# Altium PCB Glucometer-E.C.- Full V1.2.PcbDoc
Units mm, origin at the board's own origin, x right, y up, seen from the top; angles counter-clockwise.
Board outline 54 x 65 mm, 2 copper layers (Top Layer, Bottom Layer); 47 components, 56 nets, 206 pads, 28 vias.
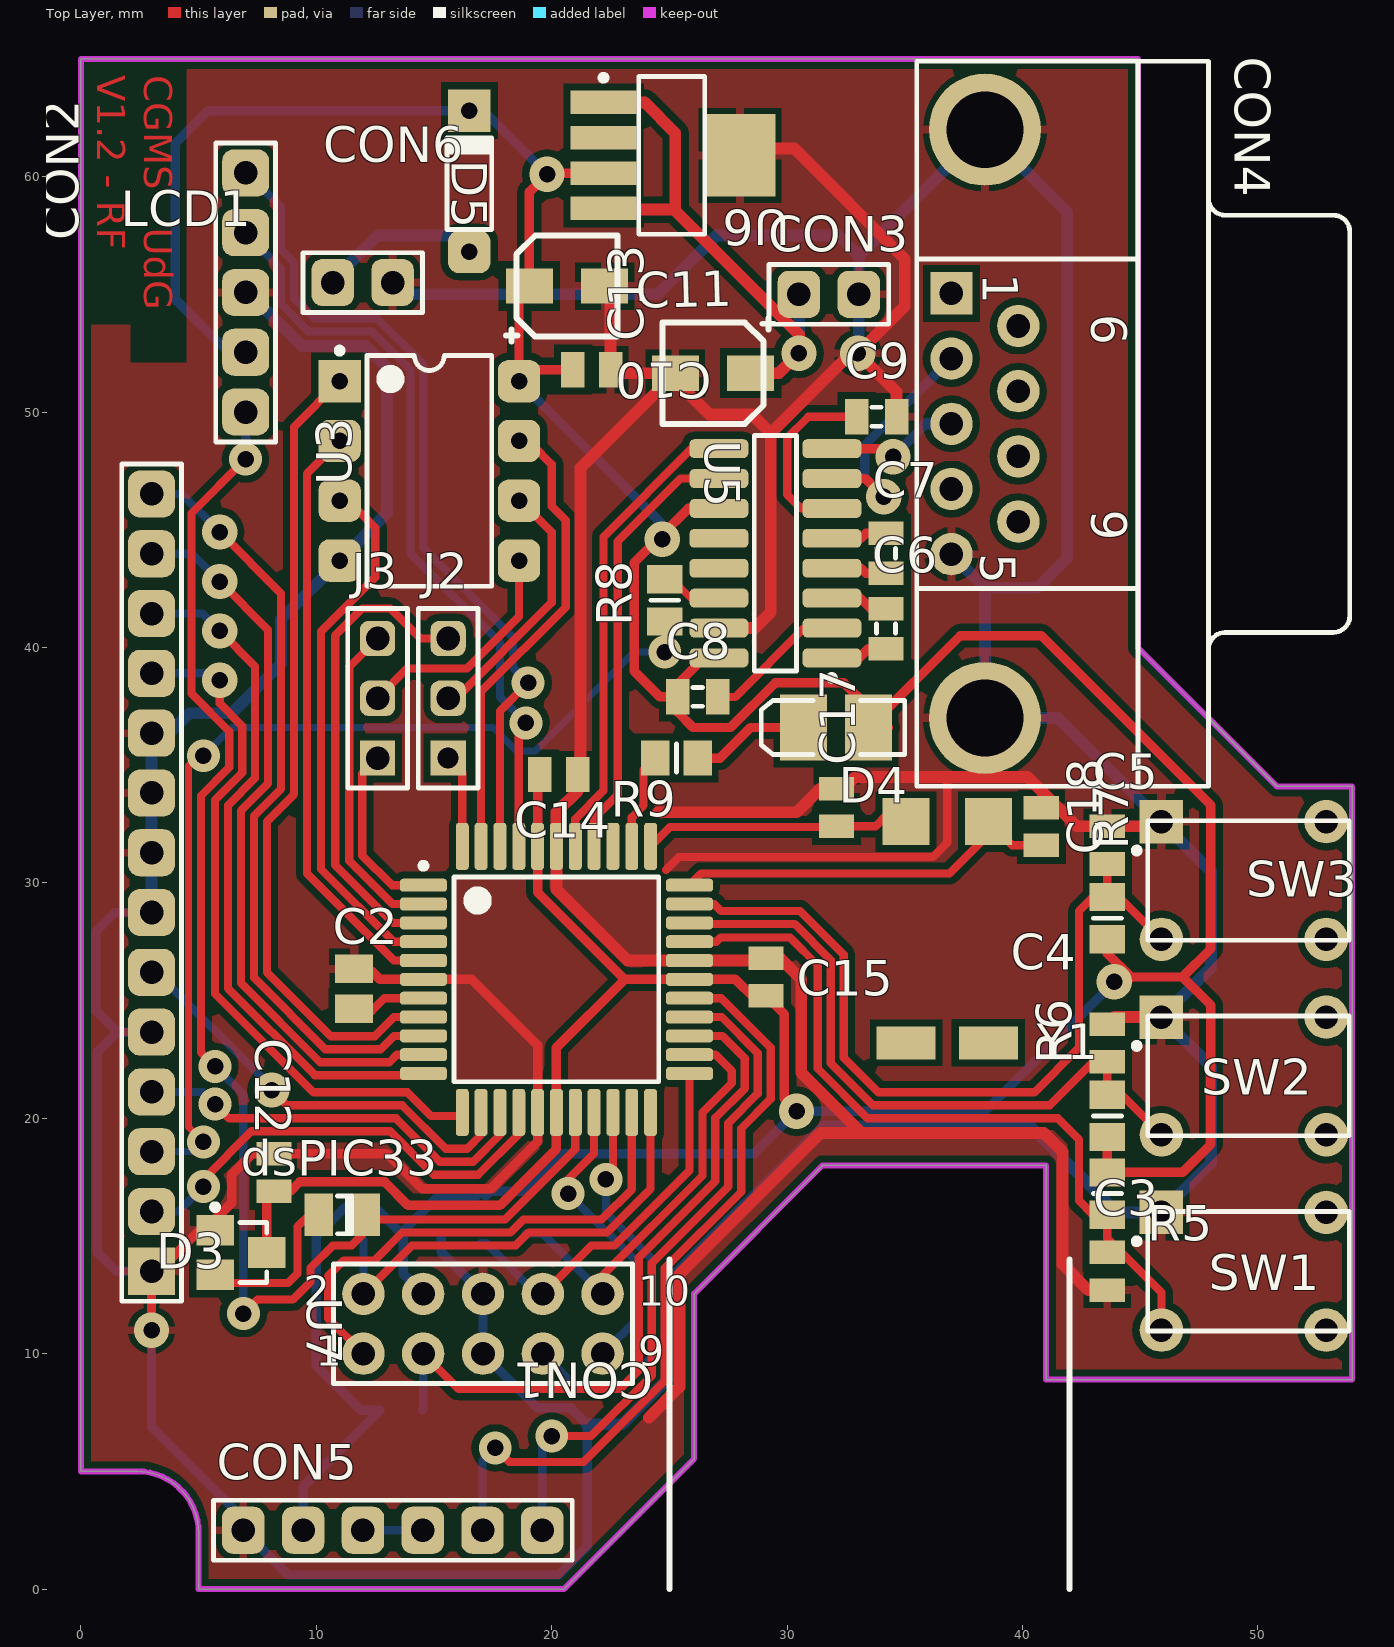
[diagram p0: Top Layer view]
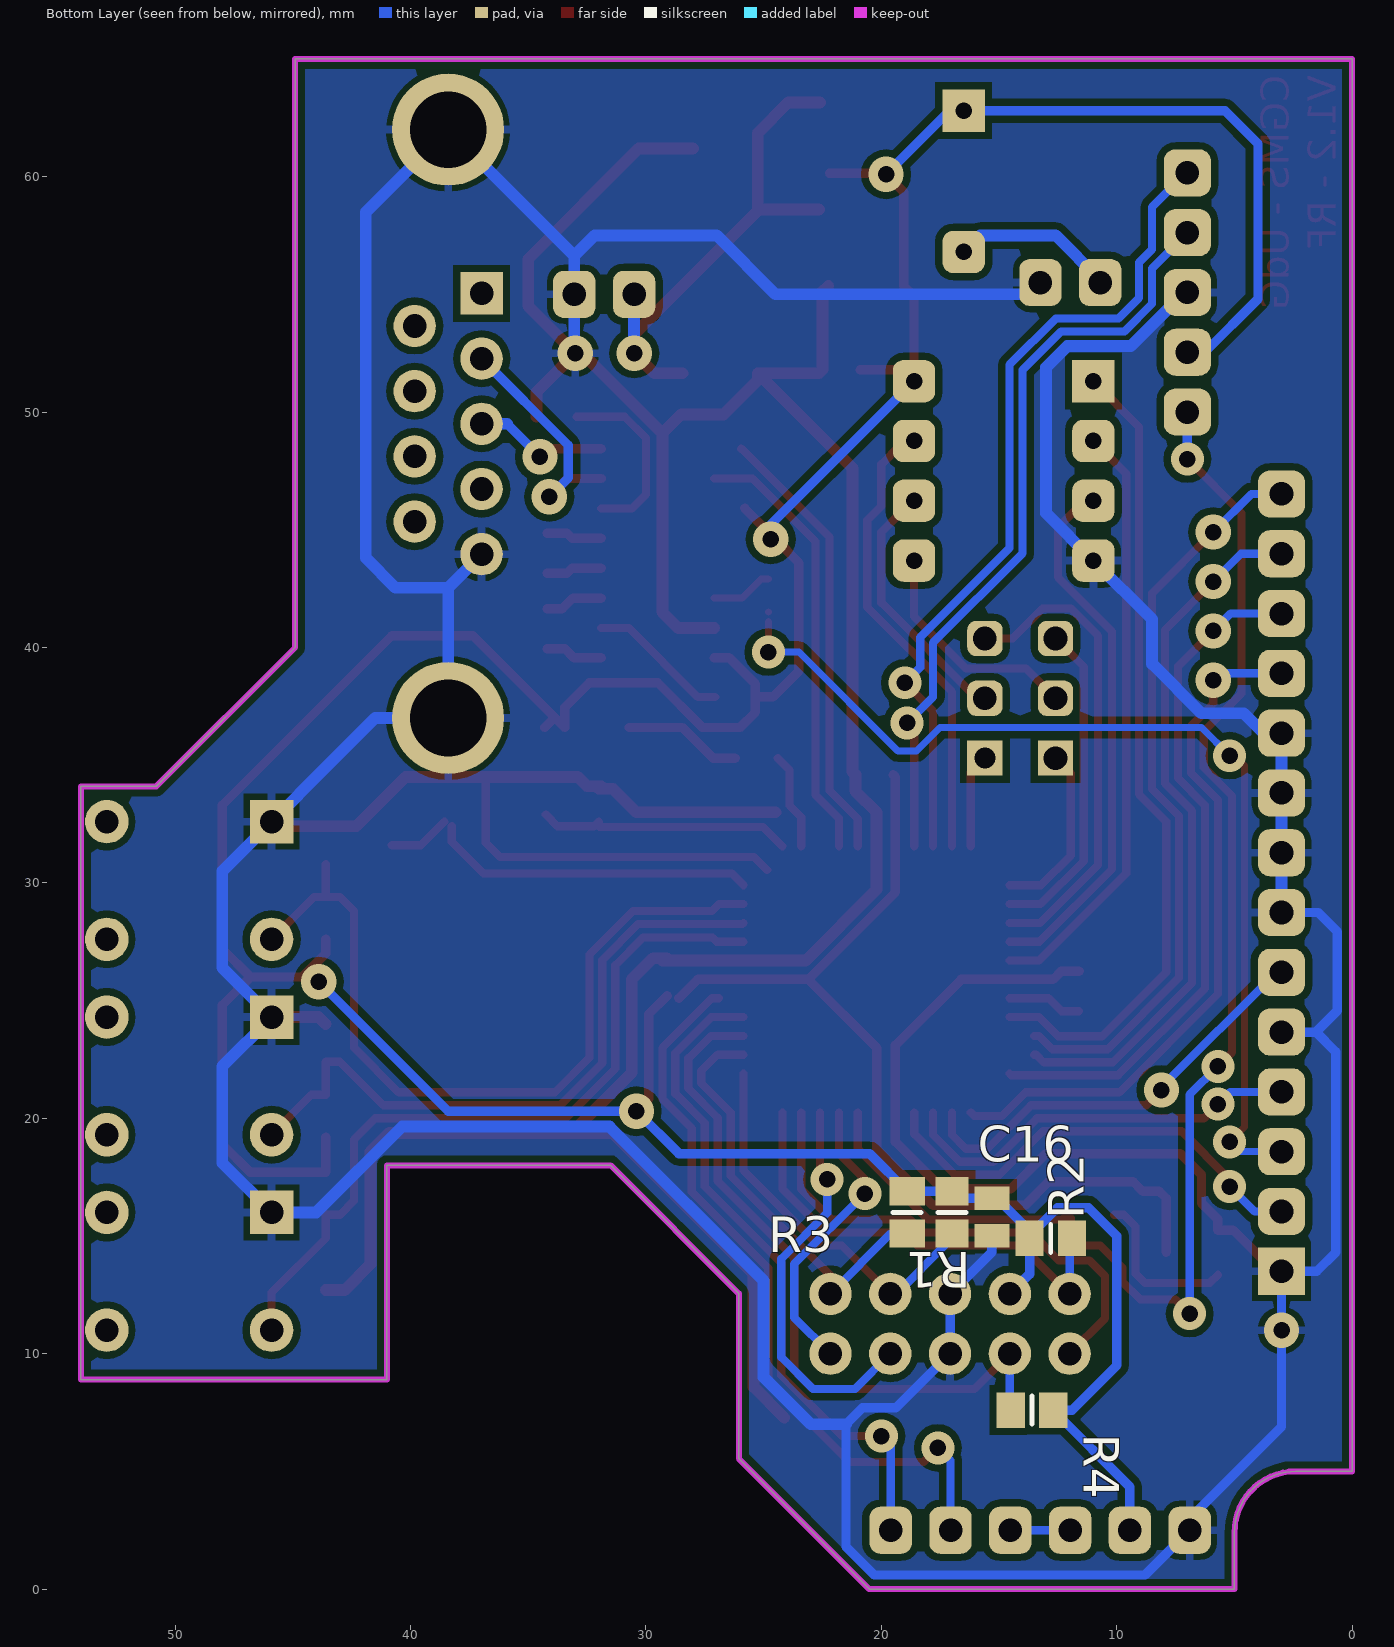
[diagram p1: Bottom Layer view, seen from below]

## Layer stack, top to bottom
Top Layer: signal copper 0.0356
Dielectric: dielectric 0.32, FR-4, Dk 4.8
Bottom Layer: signal copper 0.0356

## Board outline
0,5 2.4,5 cw(c2.4,2.4) 5,2.4 5,0 20.513,0 26.05,5.537 26.05,12.55 31.5,18 41,18 41,8.9 54,8.9 54,34.1 50.8,34.1 44.9,40 44.9,65 0,65

## Design rules (kind name [scope] priority, off if disabled: settings)
Clearance [All] p1: gap=0.2
PlaneConnect [All] p1: planeconnectstyle=Relief reliefexpansion=0.5 reliefentries=4 reliefconductorwidth=0.3 reliefairgap=0.25
PolygonConnect [All] p1: connectstyle=Relief reliefconductorwidth=0.35 reliefentries=4 polygonreliefangle="90 Angle" airgapwidth=0.25
RoutingVias [All] p1: holewidth=0.7 width=1.5 viastyle="Through Hole" minholewidth=0.6 minwidth=1.27 maxholewidth=1 maxwidth=2
SolderMaskExpansion [All] p1: expansion=0.102
Width [All] p1: maxlimit=5 minlimit=0.25 preferedwidth=0.35 minimp=50.000000 maximp=50.000000 favimp=50.000000
27 further rules are at their usual default settings.

## Components (designator, comment, footprint, x,y, rotation, side; value= is the part's Value field where it differs from the comment)
C2 "Cap" CAPC2012N 11.6,25.5 r270 top
C3 "Cap" CAPC1608N 43.6,13.5 r90 top
C4 "Cap" CAPC1608N 43.6,23.2 r270 top
C5 "Cap" CAPC1608N 43.6,31.6 r270 top
C6 "Cap" RESC1608N 34.2,40.8 r90 top
C7 "Cap" RESC1608N 34.2,44 r90 top
C8 "Cap" RESC1608N 26.2,37.9 r0 top
C9 "Cap" RESC1608N 33.8,49.8 r0 top
C10 "Cap Pol2" C-4x4 24.7,49.5 r0 top
C11 "Cap Pol2" C-4x4 22.8,57.5 r180 top
C12 "Cap" CAPC1608N 8.2,17.7 r270 top
C13 "Cap" CAPC1608N 21.7,51.8 r180 top
C14 "Cap" CAPC1608N 20.3,34.6 r180 top
C15 "Cap" CAPC1608N 29.1,26 r270 top
C16 "Cap" CAPC1608N 15.3,15.8 r90 bottom
C17 "Cap" CAPC1608N 32.1,33.2 r270 top
C18 "Cap" CAPC1608N 40.8,32.4 r270 top
CON1 "Header 5X2" HDR2X5 12,10 r0 top locked
CON2 "Header 5" HDR1X5 7,50 r90 top
CON3 "Header 2" HDR1X2 30.5,55 r0 top
CON4 "D Connector 9" DSUB1.385-2H9 47.9,49.5 r270 top
CON5 "Header 6" HDR1X6 19.6,2.5 r180 top
CON6 "Header 2" HDR1X2 10.7,55.5 r0 top
D3 "1N4148" CD3216-1206 11.2,15.9 r0 top
D4 "LED2" 3.2X1.6X1.1 32.1,36.6 r180 top
D5 "1N4148" DO-35 16.5,59.7 r90 top
dsPIC33 "DSPIC33FJ64MC804-I/PT" TQFP-PT44_N 20.2,25.9 r0 top
J2 "Header 3" HDR1X3#1 15.6,35.3 r90 top
J3 "Header 3" HDR1X3#2 12.6,35.3 r90 top
LCD1 "162A" HDR1X14 3,13.5 r90 top locked
R1 "Res1" RESC2012N#1 17,16 r270 bottom
R2 "Res1" RESC2012N#2 12.8,14.9 r180 bottom
R3 "Res1" RESC2012N#2 18.9,16 r270 bottom
R4 "Res1" RESC2012N#2 13.6,7.6 r0 bottom
R5 "Res1" RESC2012N#2 43.6,16.8 r90 top
R6 "Res1" RESC2012N#2 43.6,20.1 r270 top
R7 "Res1" RESC2012N#2 43.6,28.5 r270 top
R8 "Res1" RESC2012N#2 24.8,42 r90 top
R9 "Res1" RESC2012N#2 25.3,35.3 r0 top
SW1 "SW-PB" DPST-4 49.6,13.5 r0 top
SW2 "SW-PB" DPST-4 49.6,21.8 r0 top
SW3 "SW-PB" DPST-4 49.6,30.1 r0 top
U3 "24LC1025-E/P" PDIP300-P8 14.8,47.5 r0 top
U5 "MAX3232CSE" NSO16_N 29.5,44 r180 top
U6 "LP38693MP-3.3/NOPB" MP05A_N 25.1,60.9 r0 top
U7 "Supply Voltage Supervisor" SOT23 6.8,14.3 r270 top
Y1 "ECS-240-20-7S" ECX-3S 36.8,27.9 r270 top

## Footprints (in the part's own frame and the unit in brackets; to place one, negate y for a bottom-side part, rotate by r counter-clockwise, add the part's x,y. Pads: shape width x height; smd on the part's side, far side on the other; paste and mask are expansions set on the pad)
3.2X1.6X1.1 [mm] "SMT LED; 2 Flat Leads"
  rect 2x2.8 smd: 1(-1.35,0) 2(1.4,0)
  silkscreen extent -2.9,-1.15 3.2,1.15
C-4x4 [mm] "SMD Polar Aluminium Capacitor, 4x4mm, 10V"
  rect 2x1.5 smd: 1(3.75,2.15) 2(0.55,2.15)
  silkscreen extent 0,0 4.75,4.5, body extent 0,0 4.3,4.3, height 5.4
CAPC1608N [mm] "Chip Capacitor, Body 1.6x0.8mm, IPC Medium Density"
  rect 1x1.5 smd: 1(-0.8,0) 2(0.8,0)
  body extent -0.87,-0.48 0.87,0.48, height 0.85
CAPC2012N [mm] "Chip Capacitor, Body 2.0x1.3mm, IPC Medium Density"
  rect 1.2x1.6 smd: 1(-0.85,0) 2(0.85,0)
  body extent -1.1,-0.72 1.1,0.72, height 1.1
CD3216-1206 [mm] "Chip Diode; Body 3.2 x 1.6 mm (LxW typ)"
  rect 1.2x1.8 smd: 1(-1.1,0) 2(0.9,0)
  silkscreen extent -0.3,-0.8 0.3,0.8
DO-35 [mm] "Diode, Axial; Body 3.8 x 1.9 mm (LxDia. max), Lead Dia. 0.53 mm (max)"
  rrect50% 1.8x1.8 hole 0.7: 1(-2.9,0)
  rect 1.8x1.8 hole 0.7: 2(3.1,0)
  silkscreen extent -1.95,-0.95 2.05,0.95
DPST-4 [mm] "Switch; 4 Leads"
  rect 1.85x1.85 hole 1: 1(-3.7,2.5)
  round 1.85 hole 1: 2(-3.7,-2.5) 3(3.3,-2.5) 4(3.3,2.5)
  silkscreen extent -4.88,-2.54 4.28,2.54
DSUB1.385-2H9 [mm] "Connector; D Subminiature; 9 Position; Right Angle; Pitch 1.385 mm"
  rect 1.8x1.8 hole 1: 1(-5.54,-10.92)
  round 1.8 hole 1: 2(-2.77,-10.92) 3(0,-10.92) 4(2.77,-10.92) 5(5.54,-10.92) 6(-4.155,-8.08) 7(-1.385,-8.08) 8(1.385,-8.08) 9(4.155,-8.08)
  round 4.76 hole 3.26: 10(-12.495,-9.5) 11(12.495,-9.5)
  silkscreen extent -15.4,-12.4 15.4,6
ECX-3S [mm] "Quartz Crystal, SM; 4 Leads; Body 12.5 x 4.6 x 3.7 mm (LxWxH)"
  rect 2x2 smd: 1(-4.7,-1.75) 4(-4.7,1.75)
  rect 1.4x2.5 smd: 2(4.7,-1.75) 3(4.7,1.75)
HDR1X2 [mm] "Connector; Header; 2 Position"
  rrect50% 1.8x2 hole 1: 1(0,0) 2(2.54,0)
  silkscreen extent -1.27,-1.27 3.81,1.27
HDR1X3#1 [mm] "Connector; Header; 3 Position"
  rect 1.5x1.5 hole 0.9: 1(0,0)
  rrect50% 1.5x1.5 hole 1: 2(2.54,0) 3(5.08,0)
  silkscreen extent -1.27,-1.27 6.35,1.27
HDR1X3#2 [mm] "Connector; Header; 3 Position"
  rect 1.5x1.5 hole 1: 1(0,0)
  rrect50% 1.5x1.5 hole 1: 2(2.54,0) 3(5.08,0)
  silkscreen extent -1.27,-1.27 6.35,1.27
HDR1X5 [mm] "Connector; Header; 5 Position"
  rrect50% 2x2 hole 1: 1(0,0) 2(2.54,0) 3(5.08,0) 4(7.62,0) 5(10.16,0)
  silkscreen extent -1.27,-1.27 11.43,1.27
HDR1X6 [mm] "Connector; Header; 6 Position"
  rrect50% 1.8x2 hole 1: 1(0,0) 2(2.54,0) 3(5.08,0) 4(7.62,0) 5(10.16,0) 6(12.7,0)
  silkscreen extent -1.27,-1.27 13.97,1.27
HDR1X14 [mm] "Connector; Header; 14 Position"
  rect 2x2 hole 1: 1(0,0)
  rrect50% 2x2 hole 1: 2(2.54,0) 3(5.08,0) 4(7.62,0) 5(10.16,0) 6(12.7,0) 7(15.24,0) 8(17.78,0) 9(20.32,0) 10(22.86,0) 11(25.4,0) 12(27.94,0) 13(30.48,0) 14(33.02,0)
  silkscreen extent -1.27,-1.27 34.29,1.27
HDR2X5 [mm] "Connector; Header; 5x2 Position"
  round 1.8 hole 1: 1(0,0) 2(0,2.54) 3(2.54,0) 4(2.54,2.54) 5(5.08,0) 6(5.08,2.54) 7(7.62,0) 8(7.62,2.54) 9(10.16,0) 10(10.16,2.54)
  silkscreen extent -1.27,-1.27 11.43,3.81
MP05A_N [mm] "SOT223, 5-Leads, Body 6.5x3.5mm, Pitch 1.5mm, Lead Span 7mm, IPC Medium Density"
  rect 2.8x1 smd: 1(-2.9,2.25) 2(-2.9,0.75) 3(-2.9,-0.75) 4(-2.9,-2.25)
  rect 3x3.5 smd: 5(2.9,0)
  silkscreen extent -3.02,-3.35 1.4,3.42, body extent -1.85,-3.35 1.85,3.35, height 1.8
NSO16_N [mm] "SOIC, 16-Leads, Body 9.9x3.9mm, Pitch 1.27mm, IPC Medium Density"
  rrect50% 2.5x0.8 smd: 1(-2.4,4.445) 2(-2.4,3.175) 3(-2.4,1.905) 4(-2.4,0.635) 5(-2.4,-0.635) 6(-2.4,-1.905) 7(-2.4,-3.175) 8(-2.4,-4.445) 9(2.4,-4.445) 10(2.4,-3.175) 11(2.4,-1.905) 12(2.4,-0.635) 13(2.4,0.635) 14(2.4,1.905) 15(2.4,3.175) 16(2.4,4.445)
  silkscreen extent -2.53,-5 0.9,5.42, body extent -2,-5 2,5, height 1.75
PDIP300-P8 [mm] "DIP, 8-Leads, Row Spacing 7.62mm, Pitch 2.54mm, Body 9.5x6.6mm"
  rect 1.8x1.8 hole 0.7: 1(-3.81,3.81)
  rrect50% 1.8x1.8 hole 0.7: 2(-3.81,1.27) 3(-3.81,-1.27) 4(-3.81,-3.81) 5(3.81,-3.81) 6(3.81,-1.27) 7(3.81,1.27) 8(3.81,3.81)
  silkscreen extent -3.93,-4.9 2.65,5.23, body extent -3.55,-4.9 3.55,4.9, height 5.34
RESC1608N [mm] "Chip Resistor, Body 1.6x0.8mm, IPC Medium Density"
  rect 1x1.5 smd: 1(-0.85,0) 2(0.85,0)
  silkscreen extent -0.2,-0.4 0.2,0.4, body extent -0.85,-0.48 0.85,0.48, height 0.6
RESC2012N#1 [mm] "Chip Resistor, Body 2.0x1.3mm, IPC Medium Density"
  rect 1.2x1.4 smd: 1(-0.9,0) 2(0.9,0)
  silkscreen extent 0,-0.6 0,0.6, body extent -1.07,-0.7 1.07,0.7, height 0.65
RESC2012N#2 [mm] "Chip Resistor, Body 2.0x1.3mm, IPC Medium Density"
  rect 1.2x1.5 smd: 1(-0.9,0) 2(0.9,0)
  silkscreen extent 0,-0.6 0,0.6, body extent -1.07,-0.7 1.07,0.7, height 0.65
SOT23 [mm] "SOT-23; 3 Leads; Body 3.0 x 2.6 mm, inc. leads (LxW max)"
  rect 1.3x1.6 smd: 1(-0.95,-1.1) 2(0.95,-1.1) 3(0,1.1)
  silkscreen extent -2.05,-1.22 1.28,1.1
TQFP-PT44_N [mm] "Thin QFP, 44-Leads, Body 10x10mm, Pitch 0.8mm, IPC Medium Density"
  rrect50% 2x0.55 smd: 1(-5.65,4) 2(-5.65,3.2) 3(-5.65,2.4) 4(-5.65,1.6) 5(-5.65,0.8) 6(-5.65,0) 7(-5.65,-0.8) 8(-5.65,-1.6) 9(-5.65,-2.4) 10(-5.65,-3.2) 11(-5.65,-4) 23(5.65,-4) 24(5.65,-3.2) 25(5.65,-2.4) 26(5.65,-1.6) 27(5.65,-0.8) 28(5.65,0) 29(5.65,0.8) 30(5.65,1.6) 31(5.65,2.4) 32(5.65,3.2) 33(5.65,4)
  rrect50% 0.55x2 smd: 12(-4,-5.65) 13(-3.2,-5.65) 14(-2.4,-5.65) 15(-1.6,-5.65) 16(-0.8,-5.65) 17(0,-5.65) 18(0.8,-5.65) 19(1.6,-5.65) 20(2.4,-5.65) 21(3.2,-5.65) 22(4,-5.65) 34(4,5.65) 35(3.2,5.65) 36(2.4,5.65) 37(1.6,5.65) 38(0.8,5.65) 39(0,5.65) 40(-0.8,5.65) 41(-1.6,5.65) 42(-2.4,5.65) 43(-3.2,5.65) 44(-4,5.65)
  silkscreen extent -5.77,-4.35 4.35,4.95, body extent -5,-5 5,5, height 1.2

## Part data
C2 C3 C4 C5 C6 C7 C8 C9 C12 C13 C14 C15 C16 C17 C18: "Capacitor"
C10 C11: "Polarized Capacitor (Axial)"
CON1: "Header, 5-Pin, Dual row"
CON2: "Header, 5-Pin"
CON3 CON6: "Header, 2-Pin"
CON4: "Receptacle Assembly, 9 Position, Right Angle"
CON5: "Header, 6-Pin"
D3 D5: "High Conductance Fast Diode"
D4: "Typical RED, GREEN, YELLOW, AMBER GaAs LED"
dsPIC33: "High-Performance 16-bit Digital Signal Controller, 64 KB Flash, 16 KB RAM, 44-Pin TQFP, Industrial Temperature"
J2 J3: "Header, 3-Pin"
LCD1: "16 char * 2 line LCD character display with b/light"
R1 R2 R3 R4 R5 R6 R7 R8 R9: "Resistor"
SW1 SW2 SW3: "Switch"
U3: "1 Mbit, 400kHz, 2.5V, I2C Serial EEPROM, 8-Pin PDIP, Extended Temperature"
U5: "3.0V TO 5.5V, Low-Power, up to 1Mbps, True RS-232 Transceiver Using Four 0.1µF External Capacitor"
U6: "500mA Low Dropout CMOS Linear Regulators Stable with Ceramic Output Capacitors, 5-pin SOT-223, Pb-Free"
Y1: "Crystal Oscillator"

## Via types
v1: diameter 1.5, hole 0.7, Top Layer to Bottom Layer, 14 vias
v2: diameter 1.4, hole 0.7, Top Layer to Bottom Layer, 14 vias

## Nets (pads, with @x,y where several pads share a name; then routed paths per layer and width w, separated by ;. In a path a pad name is that pad's centre, name@x,y a point inside that pad or via, vN(x,y) a via of type N, cw(c..) or ccw(c..) an arc to the next point about the centre after c; other vN are vias at no path point)
3.3V: C8.1 C11.1 C12.2 C13.2 C14.2 C15.2 C16.2 CON1.4 CON2.2 CON5.5 D4.1 D5.2 dsPIC33.17 dsPIC33.28 dsPIC33.40 R1.1 R2.1 R3.1 R4.1 R5.2 R6.2 R7.2 U3.8 U5.11 U5.16 U6.3 U7.3 | length 226
  Top Layer w0.4: U7.3 7.9,16.6 C12.2 8.9,16.9 9.3,17.3 12.9,17.3 13.9,16.3 17.8,16.3 20.2,18.7 dsPIC33.17 20.2,23 23.1,25.9 ; C14.2 19.4,34.5 dsPIC33.40 19.4,29.6 23.1,25.9 ; C13.2 19.1,51.8 U3.8 18.61,54.91 C11.1 19.05,59.35 v1(19.8,60.1) 19.85,60.15 U6.3 ; v1@24.6,44.7 25.805,45.905 ; v1(24.7,44.6) 24.5,44.6 23.5,43.6 23.5,39 24.6,37.9 C8.1 ; U5.16 26.455,39.555 25.35,38.45 C8.1 ; C15.2@28.6,25.1 27.8,25.9 dsPIC33.28 23.1,25.9 ; C15.2 29.875,24.425 29.875,20.825 v1(30.4,20.3) ; D4.1@33.875,37.025 D4.1@34.3,36.6 ; R6.2 R5.2 46.8,17.7 48,18.9 48,24.8 46.8,26 ; R7.2 43.6,27 v1@44.6,26 ; v1@43.8,25.5 44.1,25.5 v1@44.6,26 ; C8.1 25.35,37.25 26,36.6 27.6,36.6 29.5,38.5 32.4,38.5 33.45,37.45 D4.1 37.35,40.5 40.8,40.5 48,33.3 48,27.2 46.8,26 ; v1@44.6,26 46.8,26
  Bottom Layer w0.4: CON2.2 6.26,52.54 4,54.8 4,61.4 5.4,62.8 D5.2 17.1,62.8 v1(19.8,60.1) ; CON5.5@9.94,2.5 9.44,3 9.44,4.34 R4.1 11.9,7.6 10,9.5 10,15 11.2,16.2 12.516,16.2 13.6,15.116 15.084,16.6 C16.2 16.7,16.6 R1.1 ; R2.1 13.7,13.38 CON1.4 ; R1.1@17.2,16.7 17.4,16.9 R3.1 20.5,18.5 28.6,18.5 v1(30.4,20.3) 38.4,20.3 v1(43.9,25.8) ; U3.8 24.7,45.22 v1(24.7,44.6)
-V: R8.2 U5.14 | length 2.6
  Top Layer w0.3: R8.2 25.1,42.9 25.905,42.095 U5.14
BTN_D: C5.2 dsPIC33.32 R7.1 SW3.2 | length 34.9
  Top Layer w0.35: dsPIC33.32 26.9,29.1 27.2,28.8 30.556,28.8 32.4,26.956 32.4,22.572 33.872,21.1 40.5,21.1 42.4,23 42.4,28.8 43,29.4 R7.1 ; C5.2 R7.1 ; SW3.2 44.1,29.4 R7.1
BTN_E: C4.2 dsPIC33.31 R6.1 SW2.2 | length 28.7
  Top Layer w0.35: dsPIC33.31 25.9,28.25 30.328,28.25 31.85,26.728 31.85,22.344 33.644,20.55 41.15,20.55 43,22.4 C4.2 R6.1 44.2,21 SW2.2
BTN_U: C3.2 dsPIC33.30 R5.1 SW1.2 | length 32.6
  Top Layer w0.35: dsPIC33.30 27,27.5 27.175,27.675 30.125,27.675 31.3,26.5 31.3,22.116 33.416,20 41.5,20 42.4,19.1 42.4,16.5 43,15.9 R5.1 43.6,14.9 45.9,12.6 SW1.2
CSCON: CON1.9 dsPIC33.19 | length 12.6
  Top Layer w0.35: v2(20.7,16.8) 20.7,17.4 21.8,18.5 dsPIC33.19
  Bottom Layer w0.35: v2(20.7,16.8) 23.7,13.8 23.7,11.54 CON1.9
CSDATA: CON1.1 dsPIC33.21 | length 21.6
  Top Layer w0.35: CON1.1 10.5,11.5 10.5,13.3 11.162,13.962 12.462,13.962 13.65,15.15 18.241,15.15 18.791,15.7 22.12,15.7 23.4,16.98 dsPIC33.21
DB4: dsPIC33.12 LCD1.11 | length 29.5
  Top Layer w0.35: v1(5.9,38.6) 5.9,37.618 6.85,36.668 6.85,34.672 5.7,33.522 5.7,25.289 9.889,21.1 13.878,21.1 14.878,20.1 16.05,20.1 dsPIC33.12
  Bottom Layer w0.35: LCD1.11 v1@5.6,38.9
DB5: dsPIC33.11 LCD1.12 | length 29.3
  Top Layer w0.35: v1(5.9,40.7) 7.4,39.2 7.4,34.444 6.25,33.294 6.25,25.517 9.937,21.83 14.48,21.83 dsPIC33.11
  Bottom Layer w0.35: LCD1.12 5.16,41.44 v1(5.9,40.7)
DB6: dsPIC33.10 LCD1.13 | length 30
  Top Layer w0.35: v1(5.9,42.8) 7.95,40.75 7.95,34.217 6.8,33.067 6.8,25.744 10.164,22.38 13.102,22.38 13.422,22.7 13.5,22.7
  Bottom Layer w0.35: LCD1.13 4.72,43.98 v1(5.9,42.8)
DB7: dsPIC33.9 LCD1.14 | length 31.7
  Top Layer w0.35: v1(5.9,44.9) 8.5,42.3 8.5,33.989 7.35,32.839 7.35,25.972 10.392,22.93 12.73,22.93 13.3,23.5 13.5,23.5
  Bottom Layer w0.35: LCD1.14 4.28,46.52 v1(5.9,44.9)
E: dsPIC33.13 LCD1.6 | length 18.4
  Top Layer w0.35: v1(8.1,21.2) 8.75,20.55 13.65,20.55 15.5,18.7 16.4,18.7 17,19.3 dsPIC33.13
  Bottom Layer w0.35: LCD1.6 3.22,26.2 8.1,21.32 v1(8.1,21.2)
EXTP1: dsPIC33.8 U3.1 | length 34.5
  Top Layer w0.35: U3.1 9.05,49.37 9.05,33.761 7.9,32.611 7.9,26.2 10.62,23.48 12.48,23.48 13.3,24.3 dsPIC33.8
EXTP2: dsPIC33.5 U3.2 | length 25.4
  Top Layer w0.35: U3.2 9.6,47.38 9.6,30.4 13.3,26.7 dsPIC33.5
EXTP3: dsPIC33.4 U3.3 | length 23.1
  Top Layer w0.35: U3.3 11.37,46.23 12.5,45.1 12.5,42.978 10.2,40.678 10.2,30.578 13.278,27.5 dsPIC33.4
EXTP4: dsPIC33.43 U3.7 | length 19.1
  Top Layer w0.35: dsPIC33.43 17,38.122 20.6,41.722 20.6,45.4 20,46 20,47.78 U3.7@19.21,48.57
EXTP5: dsPIC33.3 J2.3 | length 20.3
  Top Layer w0.35: dsPIC33.3 13.256,28.3 10.8,30.756 10.8,40.5 11.95,41.65 13.15,41.65 14.42,40.38 J2.3
EXTP6: dsPIC33.2 J3.3 | length 13.9
  Top Layer w0.35: J3.3 11.4,39.18 11.4,30.933 13.233,29.1 dsPIC33.2
GND: C2.1 C3.1 C4.1 C5.1 C9.2 C10.2 C11.2 C12.1 C13.1 C14.1 C15.1 C16.1 C17.1 C18.1 CON1.5 CON1.6 CON2.3 CON3.2 CON4.5 CON4.10 CON4.11 CON5.6 CON6.2 dsPIC33.6 dsPIC33.16 dsPIC33.29 dsPIC33.39 LCD1.1 LCD1.5 LCD1.7 LCD1.8 LCD1.9 LCD1.10 SW1.1 SW2.1 SW3.1 U3.4 U5.15 U6.5 U7.1 | length 427.8
  Top Layer w0.3: SW2.1@46.4,24.1 SW2.1@46.5,24.1
  Top Layer w0.35: 24.85,30.55 25.4,31.1 36.2,31.1 36.8,31.7 36.8,34.5
  Top Layer w0.4: v1(3,11) LCD1.1 3.3,13.5 5.05,15.25 U7.1 5.7,15.7 6.4,16.4 6.4,17.6 7.3,18.5 13,18.5 14.5,17 17.4,17 19.4,19 dsPIC33.16 19.4,23.1 16.6,25.9 dsPIC33.6 12.7,25.9 12.35,26.25 C2.1@11.6,26.25
  Top Layer w0.5: C11.2 22.5,55.1 C13.1 22.65,51.65 C10.2 ; 24.12,7.28 25.425,8.585 25.425,13.365 31.435,19.375 33.157,19.375 ; 24.5,33 30.4,33 31.4,34 C17.1@32,34 ; U5.15 28.625,40.825 29.3,41.5 29.3,49.1 ; U6.5@28,61.2 30.3,61.2 35,56.5 35,54.5 v1(33,52.5) ; C15.1 29.7,26.8 30.6,25.9 30.6,21.932 33.157,19.375 ; C15.1@29.3,26.7 dsPIC33.29 23.219,26.7 20.2,29.719 dsPIC33.39 20.2,33 21.1,33.9 C14.1 21.225,34.725 21.225,47.625 C10.2 ; C17.1@31.9,34.1 32.5,34.1 32.9,34.5 36.8,34.5 40.2,34.5 42.3,32.4 C5.1 45.7,32.4 SW3.1 ; C9.2 34.65,50.85 v1(33,52.5) ; C3.1 42.8,12.7 41.7,13.8 41.7,18.575 40.9,19.375 33.157,19.375 ; C4.1 43.9,24.3 SW2.1 ; C10.2 25.25,51.35 26.7,49.9 28.5,49.9 29.3,49.1 ; 29.3,49.1 32.7,52.5 v1(33,52.5)
  Bottom Layer w0.4: LCD1.5 1.54,23.66 ; LCD1.7 1.44,28.74 0.627,27.927 0.627,24.573 1.54,23.66 ; C16.1 15.3,14.32 CON1.6 CON1.5 19.38,7.7 20.8,7.7 21.5,7 21.5,1.8 20.3,0.6 8.8,0.6 7.4,2 7.4,2.5 3,6.9 LCD1.1 1.5,13.5 0.7,14.3 0.7,22.82 1.54,23.66
  Bottom Layer w0.5: LCD1.7 LCD1.8 LCD1.9 LCD1.10 3.76,36.36 4.6,37.2 6.4,37.2 8.5,39.3 8.5,41.2 U3.4 13,45.7 13,51.9 12.1,52.8 9.4,52.8 CON2.3@7,55.2 ; CON6.2 13.74,55 24.5,55 27,57.5 32.175,57.5 33.04,56.635 ; 21.5,7 23,7 25,9 25,13.1 31.55,19.65 40.35,19.65 44,16 SW1.1 48,18.1 48,22.2 SW2.1 48,26.4 48,30.5 41.495,37.005 CON4.11 38.4,42.54 ; v1@33.04,52.54 CON3.2 33.04,56.635 ; CON4.5 38.4,42.54 ; 33.04,56.635 CON4.10 41.9,58.495 41.9,43.8 40.64,42.54 38.4,42.54
IRQ1: CON1.2 dsPIC33.22 R2.2 | length 19.7
  Top Layer w0.35: CON1.2 14.06,14.6 18.469,14.6 19.019,15.15 22.348,15.15 24.2,17.002 dsPIC33.22
  Bottom Layer w0.35: R2.2 12,14.8 CON1.2
LCDVDD: dsPIC33.15 LCD1.2 | length 19.6
  Top Layer w0.35: v2(5.2,17.1) 5.2,17.4 7.25,19.45 13.13,19.45 14.98,17.6 16.878,17.6 18.6,19.322 dsPIC33.15
  Bottom Layer w0.35: LCD1.2 4.14,16.04 v2(5.2,17.1)
LCDVO: LCD1.3 R8.1 | length 43
  Top Layer w0.3: LCD1.3 LCD1.3@3.03,18.55 ; v2(5.2,19) 4.575,19.625 4.575,34.975 5,35.4 v2(5.2,35.4) ; v2(24.8,39.8) R8.1
  Bottom Layer w0.3: LCD1.3 4.78,18.58 v2(5.2,19) ; v2(5.2,35.4) 6.4,36.6 17.5,36.6 18.5,35.6 19.3,35.6 23.5,39.8 v2(24.8,39.8)
LED1: dsPIC33.35 R9.1 | length 4.2
  Top Layer w0.35: dsPIC33.35 23.4,32.784 23.9,33.284 23.9,34.8 R9.1
MCLR: CON2.1 D3.2 dsPIC33.18 | length 60.6
  Top Layer w0.35: v2(5.7,22.2) 5.1,22.8 5.1,33.7 6.3,34.9 6.3,36.44 4.7,38.04 4.7,45.7 v2(7,48) ; v2(6.9,11.7) 7.5,12.3 9,12.3 9.75,13.05 9.75,13.65 10.7,14.6 11.5,14.6 11.95,15.05 11.95,15.75 D3.2 12.3,15.7 18.013,15.7 21,18.687 dsPIC33.18
  Bottom Layer w0.35: v2(5.7,22.2) 6.9,21 v2(6.9,11.7)
  Bottom Layer w0.4: v2(7,48) CON2.1
NetC2_2: C2.2 dsPIC33.7 | length 3.2
  Top Layer w0.35: C2.2@11.6,24.55 12.35,24.55 12.9,25.1 dsPIC33.7
NetC6_1: C6.1 U5.1 | length 2.5
  Top Layer w0.4: U5.1 33.055,39.555 33.45,39.95 C6.1
NetC6_2: C6.2 U5.3 | length 2.5
  Top Layer w0.4: U5.3 33.105,42.095 33.55,41.65 C6.2
NetC7_1: C7.1 U5.4 | length 2.4
  Top Layer w0.4: U5.4 33.135,43.365 33.35,43.15 C7.1
NetC7_2: C7.2 U5.5 | length 2.4
  Top Layer w0.4: U5.5 33.135,44.635 33.35,44.85 C7.2
NetC8_2: C8.2 U5.2 | length 6.1
  Top Layer w0.35: C8.2 27.8,37.9 30.725,40.825 U5.2
NetC9_1: C9.1 U5.6 | length 7.9
  Top Layer w0.35: U5.6 30.595,45.905 30,46.5 30,48.9 30.9,49.8 C9.1
NetCON5_1: CON5.1 dsPIC33.26 | length 28.4
  Top Layer w0.35: v2(20,6.5) 21.678,6.5 24.25,9.072 24.25,13.852 27.5,17.102 27.5,19.794 28.75,21.044 28.75,22.772 27.222,24.3 dsPIC33.26
  Bottom Layer w0.35: CON5.1 v2@19.6,6.5
NetCON5_2: CON5.2 dsPIC33.27 | length 31.9
  Top Layer w0.35: v2(17.6,6) 18.2,5.4 21.356,5.4 24.8,8.844 24.8,13.624 28.05,16.874 28.05,19.567 29.3,20.817 29.3,23 27.2,25.1 26.9,25.1
  Bottom Layer w0.35: CON5.2 17.06,5.46 v2(17.6,6)
NetCON5_3: CON5.3 CON5.4 | length 2.5
  Bottom Layer w0.35: CON5.4@12.48,2.5 CON5.3@15.02,2.5
NetCON6_1: CON6.1 D5.1 | length 7
  Bottom Layer w0.5: CON6.1 10.7,55.6 12.6,57.5 15.8,57.5 D5.1
NetD3_1: D3.1 U7.2 | length 6.9
  Top Layer w0.35: U7.2 6.05,13 8.8,13 9.2,13.4 9.2,15.4 9.7,15.9 D3.1
NetD4_2: D4.2 R9.2 | length 5
  Top Layer w0.4: R9.2 27.149,35.3 28.449,36.6 D4.2
NetdsPIC33_1: dsPIC33.1 J3.1 | length 7.5
  Top Layer w0.35: J3.1 11.95,34.65 11.95,31.161 13.211,29.9 dsPIC33.1
NetdsPIC33_36: dsPIC33.36
NetdsPIC33_44: dsPIC33.44 J2.1 | length 4
  Top Layer w0.35: J2.1 16.2,34.7 dsPIC33.44
PEGC: CON2.5 dsPIC33.42 | length 35.7
  Top Layer w0.35: dsPIC33.42 17.8,37.3 v2(19,38.5)
  Bottom Layer w0.35: CON2.5@7,60.2 8.5,58.7 8.5,56.9 9.05,56.35 9.05,54.85 9.925,53.975 12.587,53.975 14.55,52.012 14.55,44.228 18.35,40.428 18.35,39.15 v2(19,38.5)
PEGD: CON2.4 dsPIC33.41 | length 32.7
  Top Layer w0.35: dsPIC33.41 18.6,36.5 v2(18.9,36.8)
  Bottom Layer w0.35: CON2.4@7,57.6 8.5,56.1 8.5,54.6 9.675,53.425 12.359,53.425 14,51.784 14,44 17.8,40.2 17.8,37.9 v2(18.9,36.8) ; v2@19.15,36.55 v2@19.2,36.6
RESET: CON1.7 dsPIC33.20 | length 17.1
  Top Layer w0.35: v2(22.3,17.4) 22.6,17.7 dsPIC33.20
  Bottom Layer w0.35: CON1.7 21.12,8.5 22.9,8.5 24.25,9.85 24.25,14.028 22.3,15.978 v2(22.3,17.4)
RS: dsPIC33.14 LCD1.4 | length 17.5
  Top Layer w0.35: v2(5.7,20.6) 6.3,20 13.394,20 15.244,18.15 16.65,18.15 17.8,19.3 dsPIC33.14
  Bottom Layer w0.35: LCD1.4 5.18,21.12 v2(5.7,20.6)
RXD: CON4.2 U5.7 | length 10.2
  Top Layer w0.4: U5.7 33.325,47.175 v1(34.1,46.4)
  Bottom Layer w0.4: v1(34.1,46.4) 33.3,47.2 33.3,48.59 CON4.2
SCK: CON1.8 dsPIC33.23 R1.2 | length 16
  Top Layer w0.35: CON1.8 21.68,14.6 22.664,14.6 25.85,17.786 dsPIC33.23
  Bottom Layer w0.35: R1.2@17,14.7 17.2,14.7 19.36,12.54 CON1.8
SCL1-M: J2.2 U3.6 | length 10.5
  Top Layer w0.35: J2.2 15.94,37.84 20,41.9 20,44.9 19.21,45.69 U3.6@19.21,46.03
SDA1-M: J3.2 U3.5 | length 9.9
  Top Layer w0.35: J3.2 13.86,39.1 16.4,39.1 18.61,41.31 18.61,42.89 U3.5@19.21,43.49
SDI: CON1.10 dsPIC33.24 R3.2 | length 18.1
  Top Layer w0.35: CON1.10 22.16,13.318 26.4,17.558 26.4,20.25 27.65,21.5 27.65,22 26.95,22.7 dsPIC33.24
  Bottom Layer w0.35: R3.2 19.6,15.1 CON1.10
SDO: CON1.3 dsPIC33.25 R4.2 | length 30.4
  Top Layer w0.35: CON1.3 16.04,8.5 22.9,8.5 23.7,9.3 23.7,14.08 26.95,17.33 26.95,20.022 28.2,21.272 28.2,22.544 27.244,23.5 dsPIC33.25
  Bottom Layer w0.35: R4.2 14.54,7.64 CON1.3
SOSCI: C18.2 dsPIC33.33 Y1.4 | length 16.5
  Top Layer w0.35: dsPIC33.33 26.35,30.4 36.9,30.4 38.25,31.75 Y1.4@38.25,32.4 ; Y1.4 39.55,31.6 C18.2
SOSCO: C17.2 dsPIC33.34 Y1.1 | length 10.7
  Top Layer w0.35: dsPIC33.34 25.025,32.375 31.975,32.375 C17.2@32,32.4 ; C17.2@32,32.6 32.2,32.4 33.75,32.4 Y1.1@34.25,32.9
TXD: CON4.3 U5.8 | length 5.8
  Top Layer w0.3: v1@34.155,48.445 v1(34.5,48.1)
  Top Layer w0.4: U5.8 v1@34.155,48.445
  Bottom Layer w0.4: v1(34.5,48.1) 35.9,49.5
  Bottom Layer w0.5: 35.9,49.5 CON4.3
U1RX: dsPIC33.38 U5.9 | length 18.9
  Top Layer w0.35: dsPIC33.38 21,32.717 22.2,33.917 22.2,44.7 U5.9@25.945,48.445
U1TX: dsPIC33.37 U5.10 | length 18.8
  Top Layer w0.35: dsPIC33.37 21.8,32.74 22.8,33.74 22.8,44.5 25.475,47.175 U5.10
VDD: C10.1 CON3.1 U6.1 U6.4 | length 22.2
  Top Layer w0.5: U6.1@22.6,63.15 23.95,63.15 25.25,61.85 25.25,58.55 30.5,53.3 v1(30.5,52.5) 29.65,51.65 C10.1 ; U6.4@22.65,58.6 25.25,58.6
  Bottom Layer w0.5: v1(30.5,52.5) CON3.1
pads on no net: CON4.1 CON4.4 CON4.6 CON4.7 CON4.8 CON4.9 SW1.3 SW1.4 SW2.3 SW2.4 SW3.3 SW3.4 U5.12 U5.13 U6.2 Y1.2 Y1.3

## Polygon pours and split planes (outlines as drawn)
GND on Bottom Layer "Bottom Layer-No Net" (solid, pour order 16): 0,65 45,65 45.1,64.9 44.9,64.7 44.9,40 50.8,34.1 54,34.1 54,8.9 41,8.9 41,18 31.7,18 31.5,18 26.05,12.55 26.05,5.537 20.513,0 5,0 5,2.9 4.9,3 2.9,5 0,5
GND on Top Layer "Bottom Layer-No Net" (solid, pour order 18): 0,65 44.9,65 44.9,40 50.8,34.1 54,34.1 54,8.9 41,8.9 41,18 31.5,18 26.05,12.55 26.05,5.537 20.513,0 5,0 5,3 3,5 0,5

## Keep-outs
Keep-Out Layer:
  the board outline again, w0.254

## Other copper
Top Layer:
  text "V1.2 - RF" at 0.7,64.3 h1.2 r270
  text "CGMS - UdG" at 2.7,64.3 h1.2 r270

## Silkscreen, mask and mechanical layers (free items; w line width, h text height)
Top Overlay:
  lines w0.254: 25,0 25,14 ; 42,0 42,14

## Text inside footprints (layer, text, board x,y; h text height)
CON1: Top Overlay "10" at 23.684,12.032 h1.27; Top Overlay "9" at 23.684,9.492 h1.27; Top Overlay "1" at 9.968,9.492 h1.27; Top Overlay "2" at 9.46,12.032 h1.27
CON4: Top Overlay "6" at 42.925,54.155 h1.5 r270; Top Overlay "9" at 42.925,45.845 h1.5 r270; Top Overlay "5" at 38.2,44 h1.5 r270; Top Overlay "1" at 38.3,55.9 h1.5 r270